# Altium PCB PCB1.PcbDoc
Units mm, origin at the board's own origin, x right, y up, seen from the top; angles counter-clockwise.
Board outline 110 x 60 mm, 2 copper layers (Top Layer, Bottom Layer); 42 components, 32 nets, 198 pads, 44 vias.
Unrouted connection lines stored in the file: 13.
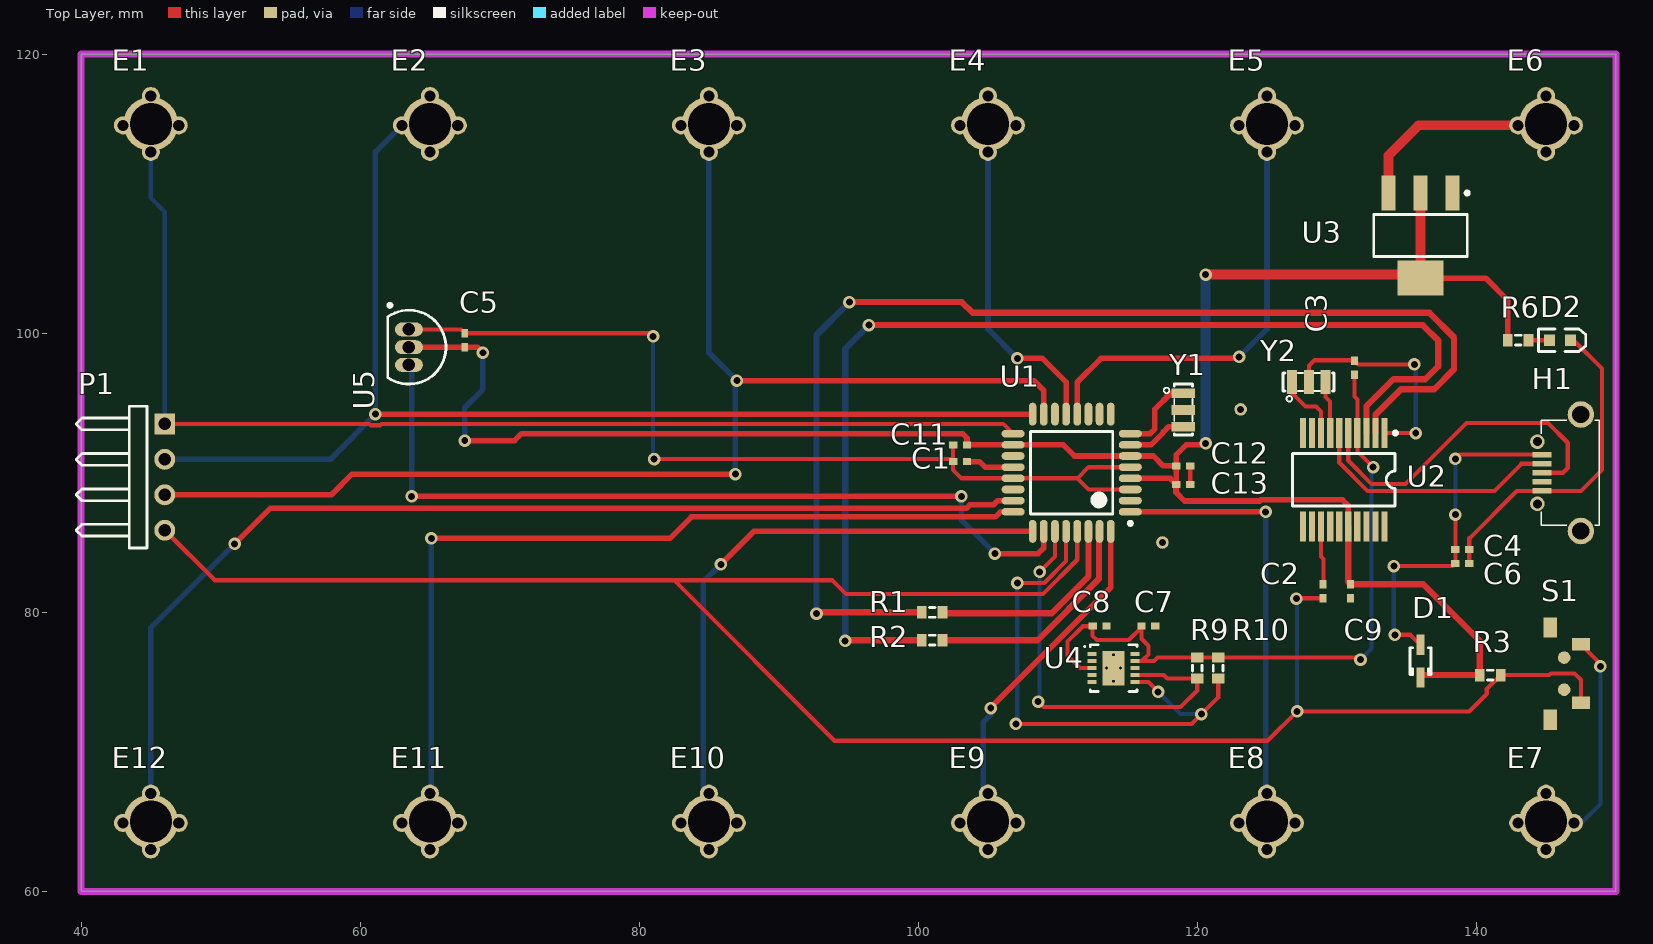
[diagram p0: Top Layer view]
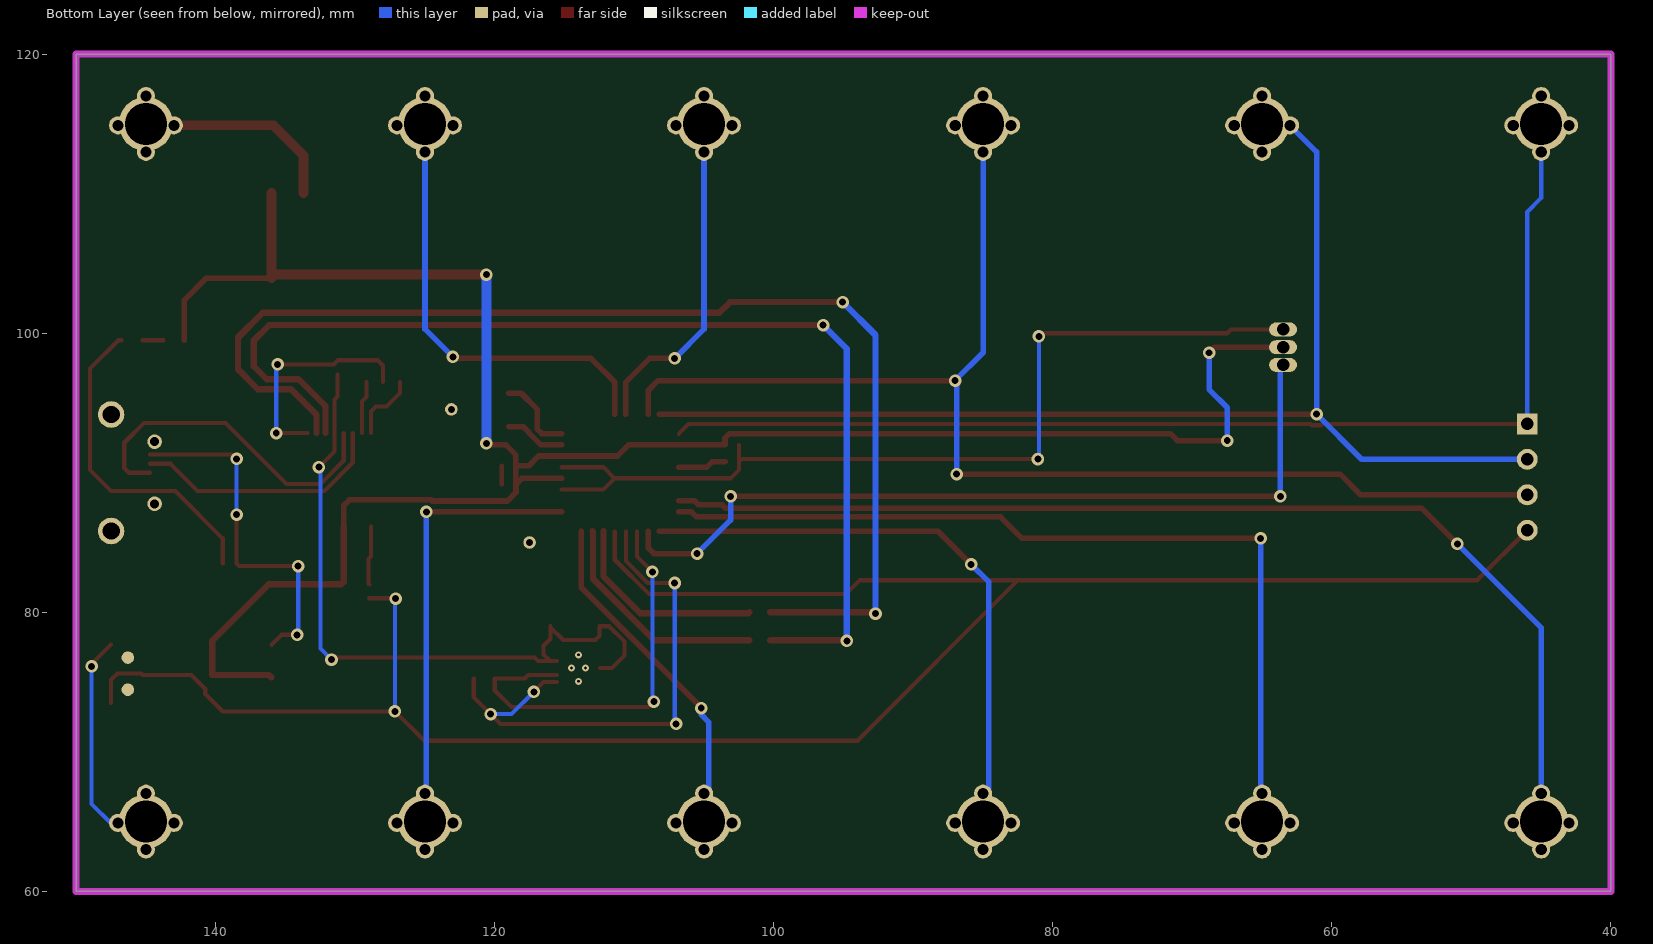
[diagram p1: Bottom Layer view, seen from below]

## Layer stack, top to bottom
Top Layer: signal copper 0.0356
Dielectric: dielectric 0.32, FR-4, Dk 4.8
Bottom Layer: signal copper 0.0356

## Board outline
40,60 150,60 150,120 40,120

## Design rules (kind name [scope] priority, off if disabled: settings)
Clearance Clearance_1 [InNamedPolygon('GND')] p1: gap=0.6
Clearance [All] p2: gap=0.2
HoleSize [All] p1: absolutevalues=TRUE maxlimit=6 minlimit=0.3 maxpercent=80.000 minpercent=20.000
PolygonConnect [All] p1: connectstyle=Relief reliefconductorwidth=0.254 reliefentries=4 polygonreliefangle="90 Angle"
RoutingVias [All] p1: holewidth=0.5 width=0.9 viastyle="Through Hole" minholewidth=0.4 minwidth=0.7 maxholewidth=0.5 maxwidth=0.9
SilkscreenOverComponentPads [All] p1: minsilkscreentomaskgap=0.254
SolderMaskExpansion SolderMaskExpansion_1 [HasFootprint('LED')] p1: expansion=0.15
SolderMaskExpansion [Not HasFootprint('LED')] p2: expansion=0.4
Width [All] p1: maxlimit=2 minlimit=0.2 preferedwidth=0.5
26 further rules are at their usual default settings.

## Components (designator, comment, footprint, x,y, rotation, side; value= is the part's Value field where it differs from the comment)
C1 "Cap Semi" 0402 103,90.8 r0 top
C2 "Cap Semi" 0402 129,81.5 r270 top
C3 "Cap Semi" 0402 131.267,97.536 r270 top
C4 "Cap Semi" 0402 139,84.5 r180 top
C5 "Cap Semi" 0402 67.5,99.5 r270 top
C6 "Cap Semi" 0402 139,83.5 r180 top
C7 "Cap Semi" 0402 116.5,79 r180 top
C8 "Cap Semi" 0402 113,79 r0 top
C9 "Cap Semi" 0402 131,81.5 r90 top
C11 "Cap Semi" 0402 103,92 r0 top
C12 "Cap Semi" 0402 119,90.5 r180 top
C13 "Cap Semi" 0402 118.999,89.154 r180 top
D1 "BAT165" SOD-323 136,76.5 r270 top
D2 "Blue" 1.6X0.8X0.6 146,99.5 r0 top
E1 "EletronIMA" TermIma 45,115 r0 top
E2 "EletronIMA" TermIma 65,115 r0 top
E3 "EletronIMA" TermIma 85,115 r0 top
E4 "EletronIMA" TermIma 105,115 r0 top
E5 "EletronIMA" TermIma 125,115 r0 top
E6 "EletronIMA" TermIma 145,115 r0 top
E7 "EletronIMA" TermIma 145,65 r0 top
E8 "EletronIMA" TermIma 125,65 r0 top
E9 "EletronIMA" TermIma 105,65 r0 top
E10 "EletronIMA" TermIma 85,65 r0 top
E11 "EletronIMA" TermIma 65,65 r0 top
E12 "EletronIMA" TermIma 45,65 r0 top
H1 "USB Soquete" ZX62RD-AB-5P8 147.5,90 r180 top
P1 "Header 4H" HDR1X4H 46,93.5 r270 top
R1 "Res3" J1-0603 101,80 r180 top
R2 "Res3" J1-0603 101,78 r180 top
R3 "Res3" J1-0603 141,75.5 r180 top
R6 "Res3" J1-0603 143,99.5 r0 top
R9 "Res3" J1-0603 120,76 r90 top
R10 "Res3" J1-0603 121.5,76 r90 top
S1 "SW-PB" SPST 147.5,73.5 r0 top
U1 "ATmega328P-AU" 32A_N 111,90 r180 top
U2 "CH340G" SSOP20 130.5,89.5 r180 top
U3 "REG1117-5" SOT-223-DB3_M 136,107 r270 top
U4 "MMA7660" DFN-MF10 114,76 r0 top
U5 "MCP1702-1202E/TO" TO-92-TO3 63.5,99 r180 top
Y1 "16MHz" X3-SMD-3.6X1.3X0.8MM 119,94.5 r270 top
Y2 "12MHz" X3-SMD-3.6X1.3X0.8MM 128,96.5 r0 top

## Footprints (in the part's own frame and the unit in brackets; to place one, negate y for a bottom-side part, rotate by r counter-clockwise, add the part's x,y. Pads: shape width x height; smd on the part's side, far side on the other; paste and mask are expansions set on the pad)
1.6X0.8X0.6 [mm] "SM LED; 2 Flat Leads"
  rect 0.8x0.8 smd: 1(-0.75,0) 2(0.75,0)
  silkscreen extent -1.55,-0.8 1.85,0.8
32A_N [mm] "Thin QFP, 32-Leads, Body 7x7mm, Pitch 0.8mm, IPC Medium Density"
  oval 1.65x0.55 smd: 1(-4.2,2.8) 2(-4.2,2) 3(-4.2,1.2) 4(-4.2,0.4) 5(-4.2,-0.4) 6(-4.2,-1.2) 7(-4.2,-2) 8(-4.2,-2.8) 17(4.2,-2.8) 18(4.2,-2) 19(4.2,-1.2) 20(4.2,-0.4) 21(4.2,0.4) 22(4.2,1.2) 23(4.2,2) 24(4.2,2.8)
  oval 0.55x1.65 smd: 9(-2.8,-4.2) 10(-2,-4.2) 11(-1.2,-4.2) 12(-0.4,-4.2) 13(0.4,-4.2) 14(1.2,-4.2) 15(2,-4.2) 16(2.8,-4.2) 25(2.8,4.2) 26(2,4.2) 27(1.2,4.2) 28(0.4,4.2) 29(-0.4,4.2) 30(-1.2,4.2) 31(-2,4.2) 32(-2.8,4.2)
  silkscreen extent -4.33,-2.95 2.95,3.75, body extent -3.5,-3.5 3.5,3.5, height 1.2
0402 [mm] "Chip Capacitor, Body 1.0x0.5mm, IPC High Density"
  rect 0.6x0.5 smd: 1(-0.5,0) 2(0.5,0)
  body extent -0.55,-0.3 0.55,0.3, height 1.3
DFN-MF10 [mm] "SON, 10-Leads, Body 3x3mm, Pitch 0.5mm, Microchip Recommended"
  rect 0.65x0.3 smd: 1(-1.55,1) 2(-1.55,0.5) 3(-1.55,0) 4(-1.55,-0.5) 5(-1.55,-1) 6(1.55,-1) 7(1.55,-0.5) 8(1.55,0) 9(1.55,0.5) 10(1.55,1)
  rect 1.55x2.48 smd: 11(0,0)
  silkscreen extent -2.12,-1.68 1.67,1.68, body extent -1.52,-1.52 1.52,1.52, height 1
HDR1X4H [mm] "Connector; Header; 4 Position; Right Angle"
  rect 1.5x1.5 hole 0.9: 1(0,0)
  round 1.5 hole 0.9: 2(2.54,0) 3(5.08,0) 4(7.62,0)
  silkscreen extent -1.27,-6.35 8.89,-1.27
J1-0603 [mm] "Chip Resistor, Body 1.6x0.8mm, IPC High Density"
  rect 0.7x0.9 smd: 1(-0.75,0) 2(0.75,0)
  silkscreen extent -0.2,-0.35 0.2,0.35, body extent -0.85,-0.48 0.85,0.48, height 0.9
SOD-323 [mm] "SOD-323/SC-76; 2 Leads; Body 1.7 x 1.3 mm, (LxW)"
  rect 1.45x0.55 smd: 1(1.175,0) 2(-1.175,0)
  silkscreen extent -0.95,-0.75 0.95,0.75
SOT-223-DB3_M [mm] "SOT223, 4-Leads, Body 6.5x3.5mm, Pitch 2.3mm, Lead Span 7mm, IPC Low Density"
  rect 2.5x1 smd: 1(-3.05,2.3) 2(-3.05,0) 3(-3.05,-2.3)
  rect 2.5x3.3 smd: 4(3.05,0)
  silkscreen extent -3.17,-3.35 1.5,3.48, body extent -1.85,-3.35 1.85,3.35, height 1.8
SPST [mm]
  round 0.9 all layers, no hole: 0(-1.2,0.95) 0(-1.2,3.25)
  rect 1.3x0.9 smd: 1(0,0) 2(0,4.2)
  rect 1x1.45 smd: 3(-2.2,-1.2) 4(-2.2,5.4)
SSOP20 [mm] "SSOP; 20 Leads; Body Width 5.3 mm; Pitch 0.65 mm"
  rect 0.45x2.15 smd: 1(-2.925,-3.35) 2(-2.275,-3.35) 3(-1.625,-3.35) 4(-0.975,-3.35) 5(-0.325,-3.35) 6(0.325,-3.35) 7(0.975,-3.35) 8(1.625,-3.35) 9(2.275,-3.35) 10(2.925,-3.35) 11(2.925,3.35) 12(2.275,3.35) 13(1.625,3.35) 14(0.975,3.35) 15(0.325,3.35) 16(-0.325,3.35) 17(-0.975,3.35) 18(-1.625,3.35) 19(-2.275,3.35) 20(-2.925,3.35)
  silkscreen extent -3.82,-3.47 3.68,1.88
TermIma [mm]
  round 1.3 hole 0.8: 1(-2,-0.1) 1(0,-2) 1(0,2) 1(2,-0.1)
  round 3.9 hole 3: 1(0,0)
TO-92-TO3 [mm] "TO, Flat Index; 3 In-Line, Axial Leads; Body Dia. 4.8mm; Leads 0.56 x 0.53 mm (max)"
  oval 2x1 hole 0.9: 1(0,-1.27) 2(0,0) 3(0,1.27)
  silkscreen extent -2.65,-3.13 1.52,2.65, body extent -2.66,-2.66 1.52,2.66, height 5.33
X3-SMD-3.6X1.3X0.8MM [mm]
  rect 0.7x1.7 smd paste-25.4 mask-25.4: 1(-1.2,0) 2(0,0) 3(1.2,0)
  silkscreen extent -1.85,-1.4 1.8,0.65
ZX62RD-AB-5P8 [mm]
  rect 1.35x0.4 smd paste-25.4 mask-25.4: 1(2.8,-1.3) 2(2.8,-0.65) 3(2.8,0) 4(2.8,0.65) 5(2.8,1.3)
  round 1.9 hole 1.25 mask-25.4: S1(0,-4.175) S2(0,4.175)
  round 1.05 hole 0.65 mask-25.4: S3(3.125,2.225) S4(3.125,-2.225)
  silkscreen extent -1.33,-3.75 2.85,3.75

## Part data
C1 C2 C3 C4 C5 C6 C7 C8 C9 C11 C12 C13: "Capacitor (Semiconductor SIM Model)"
D1: "Silicon AF Schottky Rectifier Diode"
D2: library part HSMR-C191, "Top Mount Low Profile Chip LED, Blue"
P1: "Header, 4-Pin, Right Angle"
R1 R2 R3 R6 R9 R10: "Resistor"
S1: "Switch"
U1: "8-bit AVR Microcontroller, 32KB Flash, 1KB EEPROM, 2KB SRAM, 32-pin TQFP, Industrial Grade (-40°C to 85°C)"
U2: "USB to UART interface"
U3: "800mA and 1A Low Dropout Positive Regulator 2.85V, 3.3V, 5V, and Adjustable"
U4: "Digital 3-Axis-Accelerometers Sensor;±16g"
U5: "250 mA Low Quiescent Current LDO Regulator, 3-Pin TO-92, Extended TemperatureBAG"
Y1 Y2: library part SMD-RESONATOR-16MHZ-15PF-0.5%-40R(3P-3.2X1.3MM), "Ceramic Resonator 16MHz ??0.5% (Tol) ??0.3% (Stability) 15pF 40Ohm 3-Pin CSMD T/R"

## Free pads (board coordinates)
  round 0.9 hole 0.5: 0(81.077,90.983) 1(123.114,94.539) 2(117.5,85)

## Via types
v1: diameter 0.9, hole 0.5, Top Layer to Bottom Layer, 40 vias
v2: diameter 0.5, hole 0.2, Top Layer to Bottom Layer, tented top, 4 vias

## Nets (pads, with @x,y where several pads share a name; then routed paths per layer and width w, separated by ;. In a path a pad name is that pad's centre, name@x,y a point inside that pad or via, vN(x,y) a via of type N, cw(c..) or ccw(c..) an arc to the next point about the centre after c; other vN are vias at no path point)
3V3: C3.2 C7.2 C8.1 R9.2 R10.2 U2.4 U4.3 U4.9 | length 51.1
  Top Layer w0.3: U4.3 111.6,76 110.7,76.9 110.7,77.9 111.8,79 C8.1 112.5,78.305 112.801,78.003 115.087,78.003 C7.2@116,78.916 ; C7.2 C7.2@116,78.916 ; C3.2 131.267,95.458 131.475,95.25 U2.4 131.475,91.525 v1(132.6,90.4) ; v1(131.7,76.6) 131.55,76.75 R10.2 R9.2 117.15,76.75 116.9,76.5 U4.9 116.02,76.5 116.5,76.98 116.5,77.6 116,78.1 C7.2@116,78.916
  Bottom Layer w0.3: v1(131.7,76.6) 132.5,77.4 132.5,90.3 v1(132.6,90.4)
A0: E12.1 U1.23 | length 77.5
  Top Layer w0.4: v1(51,84.9) 53.55,87.45 103.452,87.45 103.708,87.706 105.406,87.706 105.7,88 U1.23
  Bottom Layer w0.4: E12.1@45,67 45,78.9 v1(51,84.9)
A1: E11.1 U1.24 | length 60.8
  Top Layer w0.4: v1(65.1,85.3) 82.2,85.3 83.743,86.843 105.543,86.843 105.9,87.2 U1.24
  Bottom Layer w0.4: E11.1@65,67 65.1,67.1 v1(65.1,85.3)
A2: E10.1 U1.25 | length 40.4
  Top Layer w0.4: v1(85.852,83.439) 88.213,85.8 U1.25
  Bottom Layer w0.4: E10.1@85,67 84.607,67.393 84.607,82.194 v1(85.852,83.439)
D2: E9.1 U1.32 | length 22.7
  Top Layer w0.4: v1(105.2,73.127) 105.2,73.178 113.8,81.778 U1.32
  Bottom Layer w0.4: E9.1@105,67 104.648,67.352 104.648,72.111 105.2,72.663 v1(105.2,73.127)
D3: E8.1 U1.1 | length 29.9
  Top Layer w0.4: U1.1 v1(124.9,87.2)
  Bottom Layer w0.4: v1(124.9,87.2) 124.9,67.1 E8.1@125,67
D8: E5.1 U1.12 | length 30.2
  Top Layer w0.4: U1.12 111.4,96.5 113.1,98.2 122.9,98.2 v1(123,98.3)
  Bottom Layer w0.4: v1(123,98.3) 125,100.3 E5.1@125,113
D9: E4.1 U1.13 | length 22.3
  Top Layer w0.4: v1(107.1,98.2) 108.9,98.2 110.6,96.5 U1.13
  Bottom Layer w0.4: E4.1@105,113 105,100.3 v1(107.1,98.2) ; E4.1@107,114.9 E4.1@107.1,114.8
D11: E3.1 P1.3 U1.15 | length 89.5
  Top Layer w0.4: P1.3 57.94,88.42 59.42,89.9 v1(86.9,89.9) ; v1(87,96.6) 108.3,96.6 109,95.9 U1.15
  Bottom Layer w0.4: E3.1@85,113 85,98.6 v1(87,96.6) 86.9,96.5 v1(86.9,89.9)
D12: E2.1 P1.2 U1.16 | length 85
  Top Layer w0.4: v1(61.1,94.2) U1.16
  Bottom Layer w0.4: P1.2 57.86,90.96 v1(61.1,94.2) 61.1,113 E2.1@63,114.9
D13: E1.1 P1.1 U1.17 | length 81.1
  Top Layer w0.3: P1.1 60.669,93.5 60.769,93.4 61.431,93.4 61.531,93.5 106.1,93.5 U1.17
  Bottom Layer w0.3: E1.1@45,113 45,109.7 46,108.7 P1.1
D+: H1.3 U2.5 | length 24.6
  Top Layer w0.3: U2.5 130.825,90.875 132.5,89.2 134.926,89.2 139.3,93.574 145.136,93.574 146.558,92.151 146.558,90.338 146.22,90 H1.3
D-: H1.2 U2.6 | length 18.3
  Top Layer w0.3: U2.6 130.175,90.725 132.2,88.7 141.3,88.7 143.2,90.6 143.2,90.65 H1.2
GND: C1.1 C3.1 C4.1 C5.1 C6.1 C7.1 C8.2 C9.1 C11.1 C12.1 C13.1 D2.2 E7.1 H1.5 pad.0 pad.1 pad.2 S1.2 U1.3 U1.5 U1.21 U2.1 U3.1 U4.4 U4.8 U5.1 Y1.2 Y2.2 | length 123
  Top Layer w0.3: U5.1 67.23,100.27 C5.1 80.772,100 v1(81.001,99.771) ; v1(81.077,90.983) 102.317,90.983 C1.1 ; C11.1 C1.1 ; U1.3 112.219,88.8 111.419,89.6 ; U1.5 112.219,90.4 111.419,89.6 ; C13.1 C13.1 C12.1 ; Y2.2 128,97.672 128.397,98.069 131.234,98.069 C3.1 131.539,97.765 v1(135.56,97.765) ; U2.1 135.648,92.85 v1(135.661,92.837) ; C6.1 C4.1 139.5,85.3 142.9,88.7 H1.5 147.5,88.7 149,90.2 149,97.463 146.963,99.5 D2.2 ; S1.2 148.946,76.254 148.946,76.175 v1(148.895,76.124) ; C1.1 102.5,90.21 103.11,89.6 U1.21 111.419,89.6
  Bottom Layer w0.3: v1(81.001,99.771) 81.001,91.059 v1(81.077,90.983) ; v1(135.56,97.765) 135.661,97.663 v1(135.661,92.837) ; E7.1@147,64.9 147.526,64.9 148.895,66.269 v1(148.895,76.124)
MMA7660_SCL: R10.1 U1.28 U4.6 | length 38.8
  Top Layer w0.3: v1(107,72) 119.6,72 v1(120.3,72.7) 121.5,73.9 R10.1 ; v1(107.1,82.1) 108.369,82.1 109.031,82.1 110.6,83.669 U1.28 ; U4.6 116.5,75 v1(117.2,74.3)
  Bottom Layer w0.3: v1(107,72) 107.1,72 v1(107.1,82.1) ; v1(117.2,74.3) 118.8,72.7 v1(120.3,72.7)
MMA7660_SDA: R9.1 U1.27 U4.7 | length 30.2
  Top Layer w0.3: v1(108.6,73.6) 109,73.2 118.8,73.2 120,74.4 R9.1 117.85,75.25 117.6,75.5 U4.7 ; v1(108.7,82.9) 109.8,84 U1.27
  Bottom Layer w0.3: v1(108.6,73.6) 108.7,73.7 v1(108.7,82.9)
NetC1_2: C1.2 U1.20 | length 3.5
  Top Layer w0.4: C1.2 104.4,90.8 104.8,90.4 U1.20
NetC2_1: C2.1 U2.13 | length 4.2
  Top Layer w0.3: U2.13 128.875,84.002 129.057,83.82 129.057,82.057 C2.1
NetD2_1: D2.1 R6.2 | length 1.5
  Top Layer w0.3: R6.2 D2.1
NetR1_1: R1.1 U1.30 | length 14.8
  Top Layer w0.45: R1.1 101.816,79.934 109.576,79.934 112.2,82.558 U1.30
NetR2_1: R2.1 U1.31 | length 16.4
  Top Layer w0.45: R2.1 108.561,78 112.959,82.398 112.959,85.759 U1.31
NetU1_7: U1.7 Y1.3 | length 4.4
  Top Layer w0.4: U1.7 116.674,92 117.567,92.893 117.567,92.929 117.938,93.3 Y1.3
NetU1_8: U1.8 Y1.1 | length 5.8
  Top Layer w0.4: U1.8 116.625,92.8 116.967,93.142 116.967,94.564 118.103,95.7 Y1.1
NetU2_7: U2.7 Y2.3 | length 3.8
  Top Layer w0.3: Y2.3 129.2,95.438 129.525,95.113 U2.7
NetU2_8: U2.8 Y2.1 | length 5
  Top Layer w0.3: Y2.1 126.8,95.704 127.762,94.742 128.524,94.742 128.875,94.391 U2.8
RESET: C2.2 P1.4 R3.1 S1.1 U1.29 | length 154.2
  Top Layer w0.3: P1.4 49.58,82.3 82.499,82.3 ; U1.29 111.4,83.762 108.938,81.3 94.835,81.3 93.835,82.3 82.499,82.3 ; v1(127.102,80.975) 127.126,81 C2.2 ; S1.1 147.5,75.161 147.045,75.616 145.339,75.616 145.223,75.5 R3.1 140.75,74.5 140.75,74.155 139.493,72.898 v1(127.152,72.898) 125.044,70.79 94.009,70.79 82.499,82.3
  Bottom Layer w0.3: v1(127.102,80.975) 127.152,80.924 v1(127.152,72.898)
RX: R1.2 U2.2 | length 85.8
  Top Layer w0.45: v1(92.71,79.908) 92.802,80 R1.2 ; v1(95.072,102.235) 103.124,102.235 103.9,101.459 136.641,101.459 138.405,99.695 138.405,97.409 136.982,95.987 134.604,95.987 132.775,94.158 U2.2
  Bottom Layer w0.45: v1(92.71,79.908) 92.71,99.873 v1(95.072,102.235)
TMP: U1.26 U5.3 | length 58.9
  Top Layer w0.4: v1(63.7,88.3) 63.706,88.306 103.094,88.306 v1(103.1,88.3) ; v1(105.5,84.2) 108.6,84.2 109,84.6 U1.26
  Bottom Layer w0.4: U5.3 63.7,97.53 v1(63.7,88.3) ; v1(103.1,88.3) 103.1,86.6 v1(105.5,84.2)
TX: R2.2 U2.3 | length 80.9
  Top Layer w0.45: v1(94.767,77.953) 94.815,78 R2.2 ; v1(96.469,100.584) 136.169,100.584 137.272,99.481 137.272,97.623 136.347,96.698 134.061,96.698 132.125,94.762 ; U2.3 132.125,94.762 ; 132.125,94.101 132.125,94.762
  Bottom Layer w0.45: v1(94.767,77.953) 94.767,98.882 v1(96.469,100.584)
VCC: C5.2 C9.2 C11.2 C12.2 C13.2 D1.1 R3.2 R6.1 U1.4 U1.6 U1.18 U2.16 U3.2 U3.4 U5.2 | length 153.6
  Top Layer w0.3: C13.2@118.453,89.2 C13.2@118.5,89.247 ; v1@120.5,92 v1(120.6,92.1)
  Top Layer w0.4: U5.2 C5.2 68.4,99 v1(68.8,98.6) ; v1(67.5,92.3) 71.066,92.3 71.566,92.8 103.181,92.8 103.5,92.481 C11.2 U1.18 110.4,92 111.2,91.2 U1.6 116.851,91.2 117.551,90.5 C12.2 ; U1.4 118.053,89.6 118.453,89.2 118.453,88.616 118.499,88.57 ; C13.2 118.499,88.57 ; C13.2@118.5,89.247 C12.2 ; v1@120.5,92 119.202,92 118.5,91.298 C12.2 ; U2.16 130.825,87.64 130.415,88.05 124.548,88.05 124.474,87.976 119.093,87.976 118.499,88.57 ; U3.4 140.677,103.95 142.25,102.377 R6.1
  Top Layer w0.45: U2.16 130.825,82.175 C9.2 136.2,82 140.25,77.95 R3.2 136.175,75.5 D1.1
  Top Layer w0.7: v1(120.6,104.2) 135.75,104.2 U3.4 U3.2
  Bottom Layer w0.4: v1(67.5,92.3) 67.5,94.678 68.8,95.978 v1(68.8,98.6)
  Bottom Layer w0.7: v1(120.6,92.1) v1(120.6,104.2)
VIN: E6.1 U3.3 | length 12.9
  Top Layer w0.7: U3.3 133.7,112.745 135.855,114.9 E6.1@143,114.9
VUSB: C4.2 C6.2 D1.2 H1.1 | length 25.4
  Top Layer w0.3: v1(134.087,83.312) 138.312,83.312 C6.2 C4.2 v1(138.5,87) ; v1(134.163,78.384) 135.291,78.384 D1.2 ; v1(138.5,91) 138.8,91.3 H1.1
  Bottom Layer w0.3: v1(134.087,83.312) 134.087,78.461 v1(134.163,78.384) ; v1(138.5,87) v1(138.5,91)
pads on no net: H1.4 H1.S1 H1.S2 H1.S3 H1.S4 S1.0 S1.3 S1.4 U1.2 U1.9 U1.10 U1.11 U1.14 U1.19 U1.22 U2.9 U2.10 U2.11 U2.12 U2.14 U2.15 U2.17 U2.18 U2.19 U2.20 U4.1 U4.2 U4.5 U4.10 U4.11
copper on no net:
  other v2: 114,75.05 113.5,76 114.5,76 114,76.95

## Polygon pours and split planes (outlines as drawn)
GND on Top Layer "GND" (solid, remove dead copper, shelved, pour order 4): 150,60 150,120 40,120 40,60
GND on Bottom Layer "GND" (solid, remove dead copper, shelved, pour order 2): 150,60 150,120 40,120 40,60

## Keep-outs
Keep-Out Layer:
  the board outline again, w0.5